# EAGLE board qec_pcb (EAGLE 9.6.1)
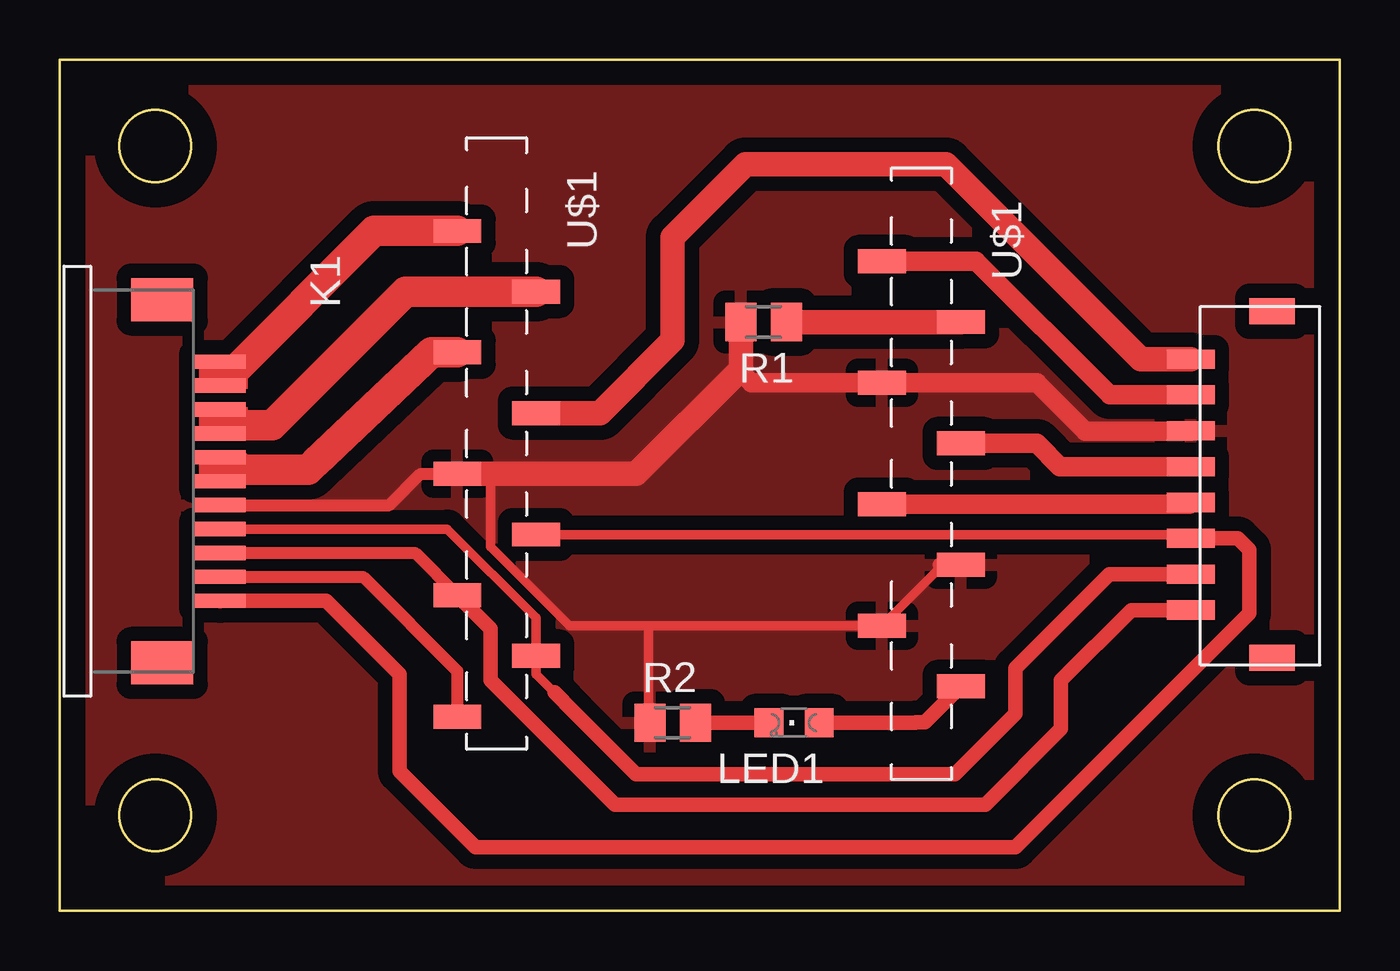
[diagram p0: board, top side]

Size 53.57 x 35.61 mm. Coordinates in mm from the lower left corner, seen from the top.
Outline: 0,0 53.57,0 53.57,35.61 0,35.61 0,0
Outline: circle at 4,32 radius 1.5
Outline: circle at 50,32 radius 1.5
Outline: circle at 50,4 radius 1.5
Outline: circle at 4,4 radius 1.5
Copper layers (1*16): Top 0.035mm / dielectric 1.5mm / Bottom 0.035mm
Design rules "default *": minimum track width 6mil, minimum drill 0.35mm, track to track 6mil, track to pad 6mil, pad to pad 6mil, via to via 6mil, smd to smd 6mil, copper to edge 40mil, drill to drill 6mil, minimum pad ring 10mil, minimum via ring 8mil, stop-mask expansion 4mil, vias tented up to drill 0mil, thermal gap 20mil

## Footprints (pad centres in the part's own frame; a part is rotated, then mirrored left to right if it is on the bottom)
JST = smd 0.8 x 2: 1 -4.8,-2.7; 2 -3.3,-2.7; 3 -1.8,-2.7; 4 -0.3,-2.7; 5 1.2,-2.7; 6 2.7,-2.7; 7 4.2,-2.7; 8 5.7,-2.7 | smd 1.1 x 1.9: 9 -6.8,0.7; 10 7.7,0.7
68611114122 = smd 0.6 x 2.2: 1 1.5,1.1; 2 0.5,1.1; 3 -0.5,1.1; 4 -1.5,1.1; 5 -2.5,1.1; 6 -3.5,1.1; 7 -4.5,1.1; 8 -5.5,1.1; 9 -6.5,1.1; 10 -7.5,1.1; 11 -8.5,1.1 | smd 1.8 x 2.6: Z1 -11.1,-1.3; Z2 4.1,-1.3
CHIPLED_0805 = smd 1.2 x 1.2: A 0,-1.05; C 0,1.05
M0805 = smd 1.3 x 1.6: 1 -0.95,0; 2 0.95,0
1-Q-EC-SMD = smd 2 x 1: 1 -10.54,7.62; 2 -7.24,5.08; 3 -10.54,2.54; 4 -7.24,0; 5 -10.54,-2.54; 6 -7.24,-5.08; 7 -10.54,-7.62; 8 -7.24,-10.16; 9 -10.54,-12.7; 10 10.54,-11.43; 11 7.24,-8.89; 12 10.54,-6.35; 13 7.24,-3.81; 14 10.54,-1.27; 15 7.24,1.27; 16 10.54,3.81; 17 7.24,6.35

## Placement (x,y rotation side)
CTRL  JST8  [JST]  50.04,18.29 270 top
K1  68611114122  [68611114122]  5.59,14.48 270 top
LED1  [CHIPLED_0805]  30.73,7.87 90 top
R1  470  [M0805]  29.46,24.64 180 top
R2  1k  [M0805]  25.65,7.87 0 top
U$1  1-Q-EC1-Q-EC-SMD  [1-Q-EC-SMD]  27.18,20.83 0 top

## Library data of the parts
CTRL K1 U$1 = dedo
LED1 = led
R1 R2 = resistor

## Nets
+24V: CTRL.1 U$1.4
DIR: CTRL.4 U$1.14
EN: CTRL.5 U$1.13
GND: CTRL.3 K1.5 R1.2 R2.1 U$1.5 U$1.11 U$1.12 U$1.15
H1: CTRL.8 K1.3 U$1.7
H2: CTRL.7 K1.4 U$1.8
N$1: LED1.C R2.2
N$2: LED1.A U$1.10
N$5: K1.10 K1.11 U$1.1
N$6: R1.1 U$1.16
N$11: K1.8 K1.9 U$1.2
N$12: K1.6 K1.7 U$1.3
N$16: K1.2 U$1.9
SVS: CTRL.2 U$1.17
V+: CTRL.6 K1.1 U$1.6

## Tracks (layer width: path | path; a pad name or v marks a point on that pad's centre or on a via)
+24V
  Top 1.016: U$1.4 22.61,20.83 25.65,23.88 25.65,28.19 28.7,31.24 37.08,31.24 45.24,23.09 CTRL.1
DIR
  Top 0.61: 38.61,19.56 U$1.14
  Top 0.813: U$1.14 40.89,19.56 41.86,18.59 CTRL.4
EN
  Top 0.813: U$1.13 47.27,17.02 CTRL.5
GND
  Top 0.406: U$1.5 16.51,18.29 | 24.64,11.94 21.34,11.94 18.03,15.24 18.03,18.29 | 24.64,11.94 34.04,11.94 | U$1.11 36.83,14.35 36.83,14.48 | R2.1 24.64,7.94 24.64,11.94
  Top 0.508: K1.5 13.8,16.98 15.11,18.29 16.51,18.29
  Top 0.61: 36.83,14.48 U$1.12 | 33.66,11.94 34.04,11.94 U$1.11
  Top 0.813: CTRL.3 47.32,20.07 42.93,20.07 40.89,22.1 U$1.15 | U$1.15 34.35,22.16 | R1.2 28.51,22.54 28.96,22.1 U$1.15
  Top 1.016: 16.51,18.29 18.03,18.29 24.13,18.29 28.51,22.67 | 28.51,22.54 28.51,22.67 | 28.51,22.67 R1.2
  pour Top (isolate 0.61): 0.25,0 53.59,0 53.59,35.43 0,35.43 0,-0.25
H1
  Top 0.508: K1.3 14.87,14.98 U$1.7 | 18.03,9.65 18.54,9.14
  Top 0.61: CTRL.8 44.85,12.59 41.91,9.65 41.91,7.62 38.73,4.45 23.24,4.45 18.03,9.65 18.03,11.81 U$1.7
H2
  Top 0.406: K1.4 16.22,15.98 19.94,12.26 U$1.8 19.94,9.91 21.53,8.32
  Top 0.61: CTRL.7 43.93,14.09 40.01,10.16 40.01,8.26 37.47,5.71 24.13,5.71 21.53,8.32 20.7,9.14
N$1
  Top 0.61: LED1.C R2.2
N$2
  Top 0.61: LED1.A 35.81,7.87 35.84,7.9 36.22,7.9 U$1.10
N$5
  Top 0.508: K1.11 K1.10 7.09,22.38 8.1,23.39
  Top 1.27: U$1.1 13.16,28.45 7.09,22.38
N$6
  Top 1.016: U$1.16 R1.1
N$11
  Top 0.508: K1.8 6.69,20.32 K1.9 6.84,20.83 | 14.48,25.91 10.67,22.1
  Top 1.27: U$1.2 14.48,25.91 8.89,20.32 6.69,20.32
N$12
  Top 0.508: K1.6 K1.7 6.35,18.47 8.13,18.22 9.36,18.46
  Top 0.61: K1.6 7.31,18.6 7.62,18.91 6.35,18.47
  Top 1.27: U$1.3 15.57,23.37 10.67,18.72 10.41,18.46 9.36,18.46 7.45,18.46 7.31,18.6
N$16
  Top 0.508: K1.2 12.69,13.98 16.64,10.03 U$1.9
SVS
  Top 0.813: U$1.17 38.35,27.18 43.94,21.59 CTRL.2
V+
  Top 0.406: U$1.6 47.59,15.75 47.75,15.59
  Top 0.61: 6.71,12.95 K1.1 11.15,12.98 14.22,9.91 14.22,5.84 17.4,2.67 40.01,2.67 49.78,12.45 49.78,15.11 49.31,15.59 47.75,15.59 CTRL.6
(copper drawn outside any net)
  shapes: Top area x3